# Altium PCB Arduino_FPGA_Shield.PcbDoc (part 2 of 2)
Units mil, origin at the board's own origin, x right, y up, seen from the top; angles counter-clockwise.
Board outline 2700 x 2100 mil, 4 copper layers (Top, PWR, GND, Bottom), stack 79.645 mil thick; 88 components, 145 nets, 490 pads, 201 vias.
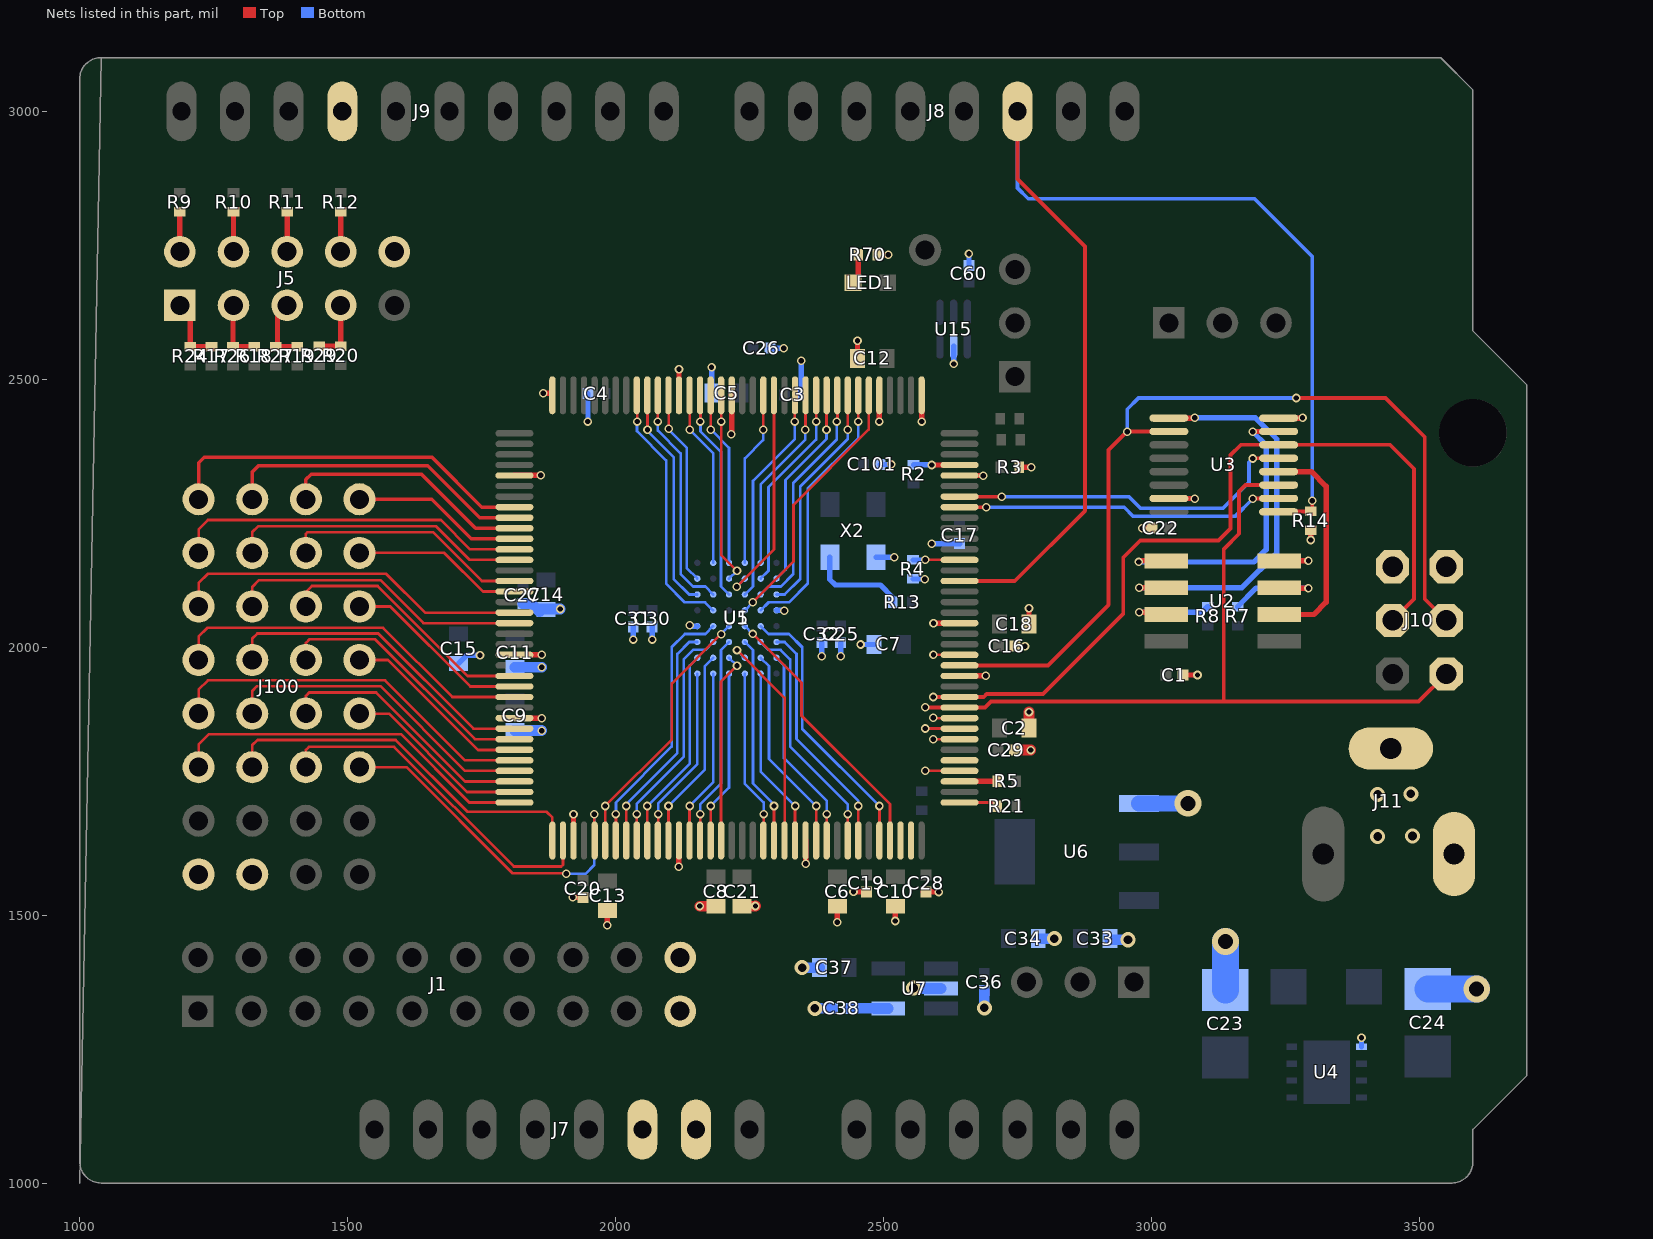
[diagram p4: the nets of this part, all layers, seen from the top]

## Via types
v1: diameter 16, hole 10, Top to Bottom, 176 vias
v2: diameter 28, hole 16, Top to Bottom, 10 vias
v3: diameter 15.94, hole 10, Top to Bottom, 8 vias
v4: diameter 19.68, hole 10, Top to Bottom, 4 vias
v5: diameter 50, hole 28, Top to Bottom, 3 vias

## Nets (pads, with @x,y where several pads share a name; then routed paths per layer and width w, separated by ;. In a path a pad name is that pad's centre, name@x,y a point inside that pad or via, vN(x,y) a via of type N, cw(c..) or ccw(c..) an arc to the next point about the centre after c; other vN are vias at no path point) (continued)
GND: C1.2 C2.2 C3.1 C4.1 C5.2 C6.2 C7.2 C8.2 C9.2 C10.2 C11.2 C12.2 C13.2 C14.1 C15.2 C16.1 C17.1 C18.1 C19.1 C20.1 C21.1 C22.2 C23.2 C24.2 C25.2 C26.2 C27.2 C28.1 C29.1 C30.2 C31.2 C32.2 C33.2 C34.2 C36.1 C37.1 C38.1 C60.1 C101.2 J1.19 J1.20 J5.10 J7.6 J7.7 J9.7 J10.6 J11.2 J11.3 J100.29 J100.30 R3.1 R4.1 R14.1 R70.2 U1.3 U1.13 U1.25 U1.49 U1.54 U1.68 U1.73 U1.77 U1.91 U1.96 U1.108 U1.113 U1.130 U1.136 U2.4 U3.8 U3.15 U4.1 U5.D1 U5.E6 U6.1 U7.2 U15.2 X2.2 | length 2627.1
  Top w5: U1.96@2117.91,2470.36 U1.96@2118.01,2470.26
  Top w10: U1.136@1800.33,1867.58 U1.136@1811.24,1867.58 v1@1864.58,1867.58 ; U1.130@1811.24,1985.69 1811.54,1986 v1(1862,1986) ; U1.113@1811.55,2320.65 v1(1860.49,2320.65) ; v1(1865,2474) 1878.05,2474 U1.108@1882.1,2469.95 ; v1(1920,1533) 1919.5,1533 1919.25,1533.25 C20.1@1939,1533.25 ; U1.3@1921.47,1639.24 v1(1921.47,1688.17) ; C13.2@1981.3,1509.84 1984.25,1506.89 v1(1984.25,1481.3) v1@1985,1482.05 ; v1(2118.11,1590.31) 2118.11,1639.45 U1.13@2118.32,1639.24 ; U1.96@2118.32,2469.95 v1(2118.32,2518.88) ; v1(2157,1516.88) v1@2157.44,1516.44 ; v1(2216,2397) 2216.85,2397.85 U1.91@2216.85,2469.84 ; U1.91@2216.12,2469.74 U1.91@2216.33,2469.53 ; v1(2354.65,1596) U1.25@2354.65,1639.34 ; v1(2413.56,1486.44) 2414,1486.88 C6.2@2414,1516.44 ; v1(2444,1543.5) 2444.25,1543.25 C19.1@2473,1543.25 ; C12.2@2451.44,2539 v1(2451.44,2571.56) ; R70.2@2488.19,2732.28 v1(2508.86,2732.28) ; v1(2492.34,2421.01) U1.77@2492.34,2469.95 ; v1(2522,1489) C10.2@2522,1516.44 ; v1(2571.08,2421.01) U1.73@2571.08,2469.95 ; C28.1@2574,1543.25 2602.75,1543.25 v1(2603,1543) ; v1@2577,2126 v1(2577,2127) ; v1(2593.25,2044.75) U1.54@2641.94,2044.75 ; U1.49@2641.94,1946.32 v1(2690.88,1946.32) ; U1.68@2641.94,2320.34 v1@2686,2320.34 ; C16.1@2745.75,2002 v1(2764,2002) ; R3.1@2753.72,2336 v1(2776,2336) ; C18.1@2771.56,2043 v1(2771.56,2072.44) ; v1(2983,2222) C22.2@3001.25,2222 ; U3.15@3032.64,2277.5 3080.5,2277.5 v1(3081,2277) ; C1.2@3058.75,1948 v1(3086,1948) ; U3.8@3237.36,2427.5 3283.5,2427.5 3283,2428 v1(3282,2428) ; U2.4@3238.32,2161 v1(3293,2161) ; v1(3297,2200) R14.1@3297,2218.28
  Top w20: v1@2157.44,1516.44 C8.2@2187,1516.44 ; C21.1@2236,1516.44 2260.44,1516.44 v1(2261,1517) ; C29.1@2744.75,1808 v1(2774.64,1808) ; C2.2@2771.56,1849 v1(2771.56,1878.89)
  Bottom w10: C15.2@1707,1969.44 1722.56,1985 v1(1747,1985) ; v1(1948,2421) 1948.5,2421.5 C4.1@1948.5,2473.35 ; v1(2033.18,2014.18) C31.2@2033.18,2039.43 ; v1(2068.18,2014.18) C30.2@2068.18,2039.43 ; v1(2138.59,2040.59) 2139.95,2039.24 U5.D1@2152.65,2039.24 ; v1(2179.13,2522.64) 2179.44,2522.33 C5.2@2179.44,2474 ; C26.2@2287.75,2558 v1(2314,2558) ; U5.E6@2300.29,2068.76 2314.42,2068.76 2314.59,2068.59 2313.98,2067.98 2313.98,2067.91 v1(2314.96,2067.91) ; C3.1@2346.75,2471 v1(2346.75,2534.75) ; v1(2385,1983) C32.2@2385,2008.25 ; v1(2420,1983) C25.2@2420,2008.25 ; v1(2457.19,2005) C7.2@2482.44,2005 ; X2.2@2486.31,2167.79 2519.79,2167.79 v1(2520,2168) ; C101.2@2493.75,2341 v1(2514.5,2341) ; R4.1@2555,2127.28 2576.72,2127.28 v1(2577,2127) ; v1@2590,2193 2590.25,2193.25 C17.1@2642,2193.25 ; v1(2630.91,2528.54) U15.2@2630.91,2562.01 ; v1(2659.45,2734.25) C60.1@2659.45,2712.6 C60.1@2661.42,2710.63 ; v1(3282,2428) v1@3283,2428 ; v1(3297,2200) v1@3299,2198 ; U4.1@3391.96,1254.24 v1(3392,1271) v1(3392,1271) ; C24.2@3516,1361.99 3569.99,1361.99
  Bottom w20: C9.2@1812,1844.44 v1@1861.75,1844.44 ; C11.2@1812,1962.44 v1@1862,1962.44 ; C27.2@1827,2081.25 1843.19,2081.25 C14.1@1858.19,2066.25 ; C14.1@1858.19,2071.25 v1(1897,2071.25) ; v2(2348,1402) C37.1@2380.44,1402 ; v2(2372,1326) C38.1@2405.25,1326 ; v2(2556,1364) 2557,1363 U7.2@2607.21,1363 ; v2(2688,1327) C36.1@2688,1359.25 ; C34.2@2788.56,1456 v2(2819,1456) ; C33.2@2922.56,1454 v2(2956.25,1454)
  Bottom w30: U6.1@2977.14,1708.55 v5(3068.15,1708.55)
  Bottom w50: C23.2@3138,1359.99 v5(3138,1451) ; C24.2@3516,1361.99 v5(3607.01,1361.99)
  other v1: 1862,1844.19 1862,1867.58 1862,1962.19 2590,2193.25 2686,2320
  other v2: 3422.24,1646.65 3487.2,1647.64 3422.24,1725.39 3484.25,1726.38
HARD_TCK: J5.1 R17.1 R24.1 | length 125.2
  Top w10: J5.1@1187,2638 1206,2619 R24.1@1206,2560.72 R17.1@1246,2560.72
HARD_TDI: J5.3 R18.1 R26.1 | length 126.4
  Top w10: J5.3@1296,2643 1286,2633 R26.1@1286,2560.72 R18.1@1326,2560.72
HARD_TDO: J5.5 R19.1 R27.1 | length 136.2
  Top w10: J5.5@1387,2638 1369,2620 1369,2563.43 R27.1@1366,2560.43 R19.1@1406,2560.43 ; J5.5@1389,2636 J5.5@1396,2643
HARD_TMS: J5.7 R20.1 R29.1 | length 129.3
  Top w10: R29.1@1447,2561.43 R20.1@1487,2561.43 J5.7@1487,2634 ; J5.7@1487,2638 J5.7@1487,2634 ; J5.7@1496,2643 J5.7@1487,2634
HOLD_N: R8.1 U2.7 | length 220.5
  Top w10: v1(2977,2065) 3023.69,2065 U2.7@3027.69,2061 U2.7@2992,2061
  Bottom w10: v1(2977,2065) 3094.28,2065 R8.1@3105,2075.72
INIT_B: R5.1 U1.39 | length 70.6
  Top w10: U1.39@2641.94,1749.47 2642.47,1750 R5.1@2712.28,1750
IO0: J100.1 U1.116 | length 700.1
  Top w6.69: J100.1@1222,2276 1222,2344 1232.33,2354.33 1657.48,2354.33 1750.53,2261.28 U1.116@1811.24,2261.28
IO1: J100.2 U1.117 | length 585.2
  Top w6.69: J100.2@1322,2276 1322,2327 1333.58,2338.58 1649.61,2338.58 1746.59,2241.6 U1.117@1811.24,2241.6
IO2: J100.3 U1.118 | length 472
  Top w6.69: J100.3@1422,2276 1422,2312.75 1432.09,2322.83 1637.8,2322.83 1738.72,2221.91 U1.118@1811.24,2221.91
IO3: J100.4 U1.119 | length 319.8
  Top w6.69: J100.4@1522,2276 1657.07,2276 1730.84,2202.23 U1.119@1811.24,2202.23
IO4: J100.5 U1.120 | length 663
  Top w5: J100.5@1222,2176 1222,2220 1239.2,2237.2 1673.8,2237.2 1728.46,2182.54 U1.120@1811.24,2182.54
IO5: J100.6 U1.121 | length 558.2
  Top w5: J100.6@1322,2176 1322,2214.5 1332.89,2225.39 1665.35,2225.39 1727.89,2162.86 U1.121@1811.24,2162.86
IO6: J100.7 U1.123 | length 463.7
  Top w5: J100.7@1422,2176 1422,2211.5 1425.07,2214.57 1659.45,2214.57 1750.53,2123.49 U1.123@1811.24,2123.49
IO7: J100.8 U1.124 | length 319.1
  Top w5: J100.8@1522,2176 1680.3,2176 1752.5,2103.8 U1.124@1811.24,2103.8
IO8: J100.9 U1.126 | length 670.3
  Top w5: J100.9@1222,2076 1222,2120 1239,2137 1572,2137 1644.57,2064.43 U1.126@1811.24,2064.43
IO9: J100.10 U1.127 | length 564.1
  Top w5: J100.10@1322,2076 1322,2112.35 1334.65,2125 1561.02,2125 1641.28,2044.75 U1.127@1811.24,2044.75
IO10: J100.11 U1.132 | length 490.4
  Top w5: J100.11@1422,2076 1422,2103 1433.17,2114.17 1556.1,2114.17 1723.95,1946.32 U1.132@1811.24,1946.32
IO11: J100.12 U1.133 | length 351.1
  Top w5: J100.12@1522,2076 1579.51,2076 1728.87,1926.64 U1.133@1811.24,1926.64
IO12: J100.13 U1.134 | length 693.3
  Top w5: J100.13@1222,1976 1222,2020 1238,2036 1566.36,2036 1695.41,1906.95 U1.134@1811.24,1906.95
IO13: J100.14 U1.137 | length 606.8
  Top w5: J100.14@1322,1976 1322,2016 1331.59,2025.59 1557.09,2025.59 1734.78,1847.9 U1.137@1811.24,1847.9
IO14: J100.15 U1.138 | length 501.3
  Top w5: J100.15@1422,1976 1422,2008 1428.76,2014.76 1551.18,2014.76 1737.73,1828.21 U1.138@1811.24,1828.21
IO15: J100.16 U1.139 | length 368
  Top w5: J100.16@1522,1976 1575.18,1976 1743.18,1808 1810.71,1808 U1.139@1811.24,1808.53 U1.139@1802.28,1808.53
IO16: J100.17 U1.140 | length 703.1
  Top w5: J100.17@1222,1876 1222,1921 1238.99,1937.99 1569.88,1937.99 1719.03,1788.84 U1.140@1811.24,1788.84
IO17: J100.18 U1.141 | length 600.8
  Top w5: J100.18@1322,1876 1322,1918.5 1330.67,1927.17 1561.02,1927.17 1719.03,1769.16 U1.141@1811.24,1769.16
IO18: J100.19 U1.142 | length 493.6
  Top w5: J100.19@1422,1876 1422,1909 1428.35,1915.35 1553.15,1915.35 1719.03,1749.47 U1.142@1811.24,1749.47
IO19: J100.20 U1.143 | length 349.8
  Top w5: J100.20@1522,1876 1576.76,1876 1722.97,1729.79 U1.143@1811.24,1729.79
IO20: J100.21 U1.144 | length 692.2
  Top w5: J100.21@1222,1776 1222,1818 1241.6,1837.6 1599.41,1837.6 1726.91,1710.1 U1.144@1811.24,1710.1
IO21: J100.22 U1.1 | length 707.8
  Top w5: J100.22@1322,1776 1322,1817 1331.77,1826.77 1589.57,1826.77 1723.48,1692.86 1871.14,1692.86 1882.1,1681.9 U1.1@1882.1,1639.24
IO22: J100.23 U1.2 | length 653.6
  Top w5: J100.23@1422,1776 1422,1808 1427.98,1813.98 1586.61,1813.98 1810.04,1590.55 1898.55,1590.55 1901.79,1593.79 U1.2@1901.79,1639.24
IO23: J100.24 U1.5 | length 671.2
  Top w5: J100.24@1522,1776 1609.83,1776 1807.74,1578.09 1906.91,1578.09 v1(1908,1577) ; v1(1960,1688) 1960,1640.08 U1.5@1960.84,1639.24
  Bottom w5: v1(1908,1577) 1944,1577 1960,1593 v1(1960,1688)
IO24: U1.45 | length 48.9
  Top w5: v1@2592.59,1867.17 U1.45@2641.53,1867.17
  other v1: 2593.01,1868.21
IO25: U1.44 | length 64.3
  Top w5: v1(2578.01,1848.21) U1.44@2642.26,1848.21
IO26: U1.43 | length 48.9
  Top w5: v1(2593.01,1828.21) U1.43@2641.94,1828.21
IO27: U1.41
IO28: U1.40 | length 64.3
  Top w5: v1(2577.69,1769.16) U1.40@2641.94,1769.16
IO29: U1.34
IO30: U1.35
M0: R2.1 U1.69 | length 86.3
  Top w10: v1(2590,2340) U1.69@2641.94,2340.02
  Bottom w10: R2.1@2556,2340.72 2589.28,2340.72 v1(2590,2340)
M1: R4.2 U1.60 | length 87
  Top w5: v1(2577.69,2162.86) U1.60@2641.94,2162.86
  Bottom w10: R4.2@2555,2162.72 2577.55,2162.72 v1(2577.69,2162.86)
MISO_ARD: J10.1 U1.46 U3.3 | length 1479.8
  Top w7: v1(2578.01,1887.58) U1.46@2642.26,1887.58 ; U1.46@2641.94,1887.27 2689.32,1887.27 2700.67,1898.62 3498.62,1898.62 J10.1@3550,1950 ; 3135.14,1899.61 3135.14,2183.37 3163.39,2211.61 3163.39,2290.39 3175.5,2302.5 U3.3@3237.36,2302.5
MISO_FL: U2.2 U3.4 | length 413.2
  Top w10: U3.4@3237.36,2327.5 3298.5,2327.5 3326,2300 3326,2084 3303,2061 U2.2@3238.32,2061
MISO_FPGA: U1.65 U3.2 | length 617.5
  Top w6.69: U1.65@2641.94,2261.28 v1(2691.59,2261.28) ; v1(3189,2277) 3188.5,2277.5 U3.2@3237.36,2277.5
  Bottom w6.69: v1(2691.59,2261.28) 2692.05,2260.83 2949.17,2260.83 2966,2244 3156,2244 v1(3189,2277)
MOSI_ARD: J10.4 U1.47 U3.6 | length 1572.9
  Top w7: v1(2593.01,1906.95) U1.47@2641.94,1906.95 2687.01,1906.95 2692.46,1912.4 2797.5,1912.4 2947.11,2062.01 ; 2947.5,2062.01 2947.5,2167.5 2979,2199 3125.18,2199 3147.64,2221.46 3147.64,2358.64 3166.5,2377.5 U3.6@3237.36,2377.5 3445.5,2377.5 3490,2333 3490,2090 J10.4@3450,2050 J10.4@3435,2035
MOSI_FL: U2.5 U3.7 | length 579.3
  Top w10: v1(2976,2159) 2978,2161 U2.5@3027.69,2161 ; v1@3188.5,2402.5 U3.7@3237.36,2402.5
  Bottom w10: v1(2976,2159) 3191,2159 3214,2182 3214,2377 v1(3189,2402)
MOSI_FPGA: U1.66 U3.5 | length 665.3
  Top w6.69: U1.66@2641.94,2280.97 v1(2720.82,2280.97) ; v1@3188.5,2352.5 U3.5@3237.36,2352.5
  Bottom w6.69: v1(2720.82,2280.97) 2958.2,2280.97 2980.31,2258.86 3132.86,2258.86 3182,2308 3182,2345 v1(3189,2352)
MUX_SEL: J8.3 R14.2 U1.58 U3.1 | length 2371
  Top w7: U1.58@2641.94,2123.49 2744.93,2123.49 2875.8,2254.36 2875.8,2747.64 2750,2873.45 J8.3@2750,3000 ; U3.1@3237.36,2252.5 3237.86,2253 R14.2@3299,2253 ; R14.2@3297,2253.72 3298.28,2253.72 3300,2255.43 v1(3300,2273)
  Bottom w7: J8.3@2750,3000 2750,2857 2770.27,2836.73 3192.27,2836.73 3300,2729 v1(3300,2273)
NetC38_2: C38.2 U7.4 | length 98.3
  Bottom w20: 2462,1326 C38.2@2436.75,1326 2484,1326 2483.6,1325.6 U7.4@2508.79,1325.6
NetLED1_2: LED1.2 R70.1 | length 59.2
  Top w10: LED1.2@2442.87,2680.12 2447.83,2680.12 2452.76,2685.04 R70.1@2452.76,2732.28
NetR13_2: R13.2 X2.3 | length 181.7
  Bottom w10: X2.3@2399.69,2167.79 2399.69,2126.31 2410,2116 2494,2116 2517.28,2092.72 R13.2@2517.28,2084
PROGRAM_B: R21.1 U1.37 | length 70.9
  Top w5: U1.37@2641.94,1710.1 R21.1@2712.28,1710.1 ; R21.1@2709,1707.28 R21.1@2709.39,1706.9
REF_CLK: U1.51 | length 64.1
  Top w5: v1(2593.2,1985.69) U1.51@2641.94,1985.69 U1.51@2642.25,1986 ; U1.51@2627,1984 U1.51@2641.94,1984
RESET_ARD: J10.5
SCLK_ARD: J10.3 U1.50 U3.10 | length 1734.8
  Top w7: U1.50@2641.94,1966.01 2807.09,1966.01 2920,2078.92 2920,2368 v1@2954.5,2402.5 ; v1@2955,2402.5 U3.10@3032.64,2402.5 ; v1(3270,2465) 3437,2465 3510,2392 3510,2090 J10.3@3550,2050
  Bottom w7: v1(2955,2402) 2955,2444 2976,2465 v1(3270,2465)
SCLK_FL: U2.6 U3.9 | length 765.1
  Top w10: v1(2977,2111) U2.6@3027.69,2111 ; U3.9@3032.64,2427.5 v1@3081.5,2427.5
  Bottom w10: v1(2977,2111) 3169.07,2111 3234,2175.93 3234,2388 3194,2428 v1(3081,2428)
SOFT_TCK: J5.2 R9.1 | length 74.3
  Top w10: J5.2@1187,2738 R9.1@1187,2812.28
SOFT_TDI: J5.4 R10.1 | length 74.3
  Top w10: J5.4@1287,2738 R10.1@1287,2812.28
SOFT_TDO: J5.6 R11.1 | length 74.3
  Top w10: J5.6@1387,2738 R11.1@1387,2812.28
SOFT_TMS: J5.8 R12.1 | length 74.3
  Top w10: J5.8@1487,2738 R12.1@1487,2812.28
SRAM0_A0: U1.16 U5.A3 | length 325.6
  Top w5: U1.16@2177.38,1639.24 2177.48,1639.34 v1(2177.48,1703.59)
  Bottom w5: v1(2177.48,1703.59) 2211.71,1737.82 U5.A3@2211.71,1950.65
SRAM0_A1: U1.21 U5.A4 | length 326.1
  Top w5: U1.21@2275.8,1639.24 2276.22,1639.65 v1(2276.22,1688.59)
  Bottom w5: U5.A4@2241.24,1950.65 2241.24,1744.94 2276.22,1709.96 v1(2276.22,1688.59)
SRAM0_A2: U1.24 U5.A5 | length 338.1
  Top w5: U1.24@2334.86,1639.24 2334.96,1639.34 v1(2334.96,1703.59)
  Bottom w5: U5.A5@2270.76,1950.65 2270.76,1767.79 v1(2334.96,1703.59)
SRAM0_A3: U1.17 U5.B3 | length 359.6
  Top w5: U1.17@2197.06,1639.24 2196.59,1639.71 2196.59,1935.59 v1(2226.59,1965.59)
  Bottom w5: U5.B3@2211.71,1980.18 v1@2226.3,1965.59
SRAM0_A4: U1.23 U5.B4 | length 413
  Top w5: v1(2226.59,1994.59) 2315.65,1905.54 U1.23@2315.65,1639.71 ; U1.23@2314.59,1639.82 U1.23@2315.17,1639.24
  Bottom w5: v1(2226.59,1994.59) U5.B4@2241,1980.18
SRAM0_A5: U1.15 U5.C3 | length 392.8
  Top w5: U1.15@2157.69,1639.24 2158.11,1639.65 v1(2158.11,1688.59)
  Bottom w5: v1(2158.11,1688.59) 2158.11,1707.11 2196.59,1745.59 2196.59,1994.59 U5.C3@2211.71,2009.71
SRAM0_A6: U1.22 U5.C4 | length 393
  Top w5: U1.22@2295.49,1639.24 2295.59,1639.34 v1(2295.59,1703.59)
  Bottom w5: U5.C4@2241.24,2009.71 2256.35,1994.59 2256.35,1745.59 2295.59,1706.35 v1(2295.59,1703.59)
SRAM0_A7: U1.33 U5.D4 | length 512
  Top w5: v1(2256.12,2024.65) 2347,1933.76 2347,1872 2512.02,1706.98 U1.33@2512.02,1639.24
  Bottom w5: U5.D4@2241.24,2039.24 v1@2255.83,2024.65
SRAM0_A8: U1.95 U5.H2 | length 331.4
  Top w5: U1.95@2137.38,2470.15 U1.95@2137.59,2470.36 ; v1(2138.32,2406.01) U1.95@2138.32,2470.26
  Bottom w5: v1(2138.32,2406.01) 2182.18,2362.15 U5.H2@2182.18,2157.35
SRAM0_A9: U1.93 U5.H3 | length 327.6
  Top w5: U1.93@2176.96,2470.36 U1.93@2177.38,2469.95 ; v1(2177.69,2406.01) U1.93@2177.69,2470.26
  Bottom w5: v1(2177.69,2406.01) 2211.71,2371.99 U5.H3@2211.71,2157.35
SRAM0_A10: U1.88 U5.H4 | length 327.2
  Top w5: U1.88@2275.39,2470.36 2275.49,2470.26 v1(2275.49,2406.01)
  Bottom w5: U5.H4@2241.24,2157.35 2241.24,2352.24 2275.49,2386.49 v1(2275.49,2406.01)
SRAM0_A11: U1.84 U5.H5 | length 350.4
  Top w5: U1.84@2354.13,2470.36 2354.5,2469.99 2354.5,2406.28 v1(2354.23,2406.01)
  Bottom w5: U5.H5@2272.59,2159.17 U5.H5@2270.76,2157.35 2270.76,2303.76 2354.23,2387.23 v1(2354.23,2406.01)
SRAM0_A12: U1.92 U5.G3 | length 381.5
  Top w5: U1.92@2196.65,2470.36 U1.92@2196.75,2470.26 ; U1.92@2197.06,2469.95 v1(2197.06,2421.01) 2197.06,2171.94 v1(2226.59,2142.41)
  Bottom w5: v1(2226.59,2142.41) v1@2226.3,2142.41 ; v1@2226.3,2142.41 U5.G3@2211.71,2127.82 v1@2226.3,2142.41
SRAM0_A13: U1.87 U5.G4 | length 407
  Top w5: v1@2226.59,2113.41 2295.49,2182.31 U1.87@2295.49,2469.95 U1.87@2295.07,2470.36
  Bottom w5: v1(2226.35,2112.88) U5.G4@2241.24,2127.82 U5.G4@2241.24,2127.82 ; v1@2226.59,2113.41 v1@2226.83,2113.41
SRAM0_A14: U1.94 U5.F3 | length 394.1
  Top w5: U1.94@2157.28,2470.36 U1.94@2157.38,2470.26 ; v1(2158.32,2421.01) U1.94@2158.32,2470.15
  Bottom w5: v1(2158.32,2421.01) 2158.32,2402.68 2196.59,2364.41 2196.59,2113.41 U5.F3@2211.71,2098.29
SRAM0_A15: U1.85 U5.F4 | length 420.1
  Top w5: U1.85@2334.23,2470.15 v1(2334.24,2421) v1@2339,2421
  Bottom w5: U5.F4@2241.24,2098.29 2256.35,2113.41 2256.35,2310.35 2334.43,2388.43 2334.43,2420.81 v1(2334.24,2421) v1@2339,2421
SRAM0_A16: U1.78 U5.E4 | length 497.1
  Top w5: v1(2255.83,2083.65) 2332,2159.82 2332,2265.67 2472.34,2406.01 2472.34,2470.26 U1.78@2472.24,2470.36
  Bottom w5: U5.E4@2241.24,2068.76 v1@2255.83,2083.35
SRAM0_A17: U1.6 U5.D3 | length 495.3
  Top w5: U1.6@1980.63,1639.34 v1(1980.63,1703.59) 2105,1827.96 2105,1932.24 v1(2197.12,2024.35)
  Bottom w5: v1@2197.12,2024.65 U5.D3@2211.71,2039.24
SRAM0_CS_N: U1.26 U5.B5 | length 383.9
  Top w5: U1.26@2374.23,1639.24 2374.33,1639.34 v1(2374.33,1703.59)
  Bottom w5: U5.B5@2270.76,1980.18 2286.35,1964.59 2286.35,1791.57 v1(2374.33,1703.59)
SRAM0_D0: U1.27 U5.B6 | length 380.1
  Top w5: U1.27@2393.91,1639.24 2394.33,1639.65 v1(2394.33,1688.59)
  Bottom w5: U5.B6@2300.29,1980.18 2314.35,1966.12 2314.35,1792.93 2394.33,1712.95 v1(2394.33,1688.59)
SRAM0_D1: U1.29 U5.C5 | length 451.3
  Top w5: v1(2433.07,1688.59) 2433.07,1639.45 U1.29@2433.28,1639.24
  Bottom w5: U5.C5@2270.76,2009.71 2270.76,2009.42 2285.1,1995.08 2308.1,1995.08 2325.79,1977.39 2325.79,1814.39 2433.07,1707.11 v1(2433.07,1688.59)
SRAM0_D2: U1.30 U5.C6 | length 442.7
  Top w5: U1.30@2452.97,1639.24 2453.07,1639.34 v1(2453.07,1703.59)
  Bottom w5: U5.C6@2300.29,2009.71 2315.47,2009.71 2337.6,1987.58 2337.6,1828.74 2453.07,1713.27 v1(2453.07,1703.59)
SRAM0_D3: U1.32 U5.D5 | length 514.2
  Top w5: U1.32@2492.34,1639.24 2492.44,1639.34 v1(2492.44,1703.59)
  Bottom w5: U5.D5@2270.76,2039.24 2285.41,2024.59 2323.59,2024.59 2348.35,1999.83 2348.35,1847.68 v1(2492.44,1703.59)
SRAM0_D4: U1.79 U5.E5 | length 499.7
  Top w5: U1.79@2452.55,2470.36 U1.79@2452.97,2469.95 v1(2452.97,2421.01)
  Bottom w5: U5.E5@2270.76,2068.76 2285.81,2083.81 2321.54,2083.81 2321.69,2083.66 2323.84,2083.66 2358.59,2118.41 2358.59,2295.6 2452.97,2389.98 v1(2452.97,2421.01)
SRAM0_D5: U1.81 U5.F5 | length 444.3
  Top w5: v1@2414.02,2420.59 U1.81@2414.02,2469.53
  Top w10: U1.81@2412.97,2470.15 U1.81@2413.18,2470.36
  Bottom w5: U5.F5@2270.76,2098.29 2270.76,2098.58 2285.37,2113.19 2308.37,2113.19 2331.59,2136.41 2331.59,2306.59 2412.97,2387.97 v1(2412.97,2421.01)
SRAM0_D6: U1.80 U5.F6 | length 436
  Top w5: U1.80@2432.87,2470.36 2432.97,2470.26 v1(2432.97,2406.01)
  Bottom w5: U5.F6@2300.29,2098.29 2315.47,2098.29 2344.59,2127.41 2344.59,2299.59 2432.97,2387.97 v1(2432.97,2406.01)
SRAM0_D7: U1.82 U5.G6 | length 381.2
  Top w5: U1.82@2393.5,2470.36 2393.6,2470.26 v1(2393.6,2406.01)
  Bottom w5: U5.G6@2300.29,2127.82 2317.02,2144.55 2317.02,2312.02 2393.6,2388.6 v1(2393.6,2406.01)
SRAM0_D8: U1.10 U5.B1 | length 381.6
  Top w5: U1.10@2059.27,1639.24 2059.37,1639.34 v1(2059.37,1703.59)
  Bottom w5: v1@2059.09,1701.09 v1@2060.48,1702.48 ; v1(2059.37,1703.59) 2138.59,1782.81 2138.59,1966.12 U5.B1@2152.65,1980.18
SRAM0_D9: U1.8 U5.C1 | length 434.4
  Top w5: U1.8@2019.9,1639.24 2020,1639.34 v1(2020,1703.59)
  Bottom w5: v1(2020,1703.59) 2020,1707.01 2115.16,1802.17 2115.16,1987.39 2137.47,2009.71 U5.C1@2152.65,2009.71
SRAM0_D10: U1.9 U5.C2 | length 443.2
  Top w5: v1(2039.37,1688.59) 2039.37,1639.45 U1.9@2039.58,1639.24
  Bottom w5: v1(2039.37,1688.59) 2039.37,1707.68 2126.97,1795.28 2126.97,1977.2 2144.84,1995.08 2167.84,1995.08 2182.18,2009.42 U5.C2@2182.18,2009.71
SRAM0_D11: U1.7 U5.D2 | length 497.7
  Top w5: U1.7@2000.21,1639.24 2000.63,1639.65 v1(2000.63,1688.59)
  Bottom w5: v1(2000.63,1688.59) 2000.63,1710.28 2104.59,1814.24 2104.59,1999.83 2129.35,2024.59 2167.54,2024.59 U5.D2@2182.18,2039.24
SRAM0_D12: U1.100 U5.E2 | length 482.7
  Top w5: v1(2040.21,2421.01) U1.100@2040.21,2470.15
  Bottom w5: v1(2040.21,2421.01) 2040,2420.8 2040,2403 2094.35,2348.65 2094.35,2118.41 2129.1,2083.66 2167.28,2083.66 U5.E2@2182.18,2068.76
SRAM0_D13: U1.98 U5.F2 | length 427.9
  Top w5: v1(2078.95,2421.01) U1.98@2078.95,2469.95
  Bottom w5: v1(2078.95,2421.01) 2078.95,2404.05 2121.35,2361.65 2121.35,2136.41 2144.57,2113.19 2167.57,2113.19 2182.18,2098.58 U5.F2@2182.18,2098.29
SRAM0_D14: U1.99 U5.F1 | length 419.4
  Top w5: v1(2059.58,2406.01) U1.99@2059.58,2470.26
  Bottom w5: v1(2059.58,2406.01) 2059.58,2403.28 2108.35,2354.5 2108.35,2127.41 2137.47,2098.29 U5.F1@2152.65,2098.29
SRAM0_D15: U1.97 U5.G1 | length 368.6
  Top w5: U1.97@2098.22,2470.36 U1.97@2098.64,2469.95 ; U1.97@2098.95,2470.26 2098.95,2406.01 2099.41,2406.46 v1(2099.41,2407.48)
  Bottom w5: v1(2099.41,2407.48) 2099.41,2406.46 2098.95,2406.01 2132.59,2372.37 2132.59,2147.88 U5.G1@2152.65,2127.82
SRAM0_HBE_N: U1.12 U5.B2 | length 375.5
  Top w5: U1.12@2098.64,1639.24 2098.74,1639.34 v1(2098.74,1703.59)
  Bottom w5: v1(2098.74,1703.59) 2166.59,1771.44 2166.59,1964.59 U5.B2@2182.18,1980.18
SRAM0_LBE_N: U1.11 U5.A1 | length 341.9
  Top w5: U1.11@2078.95,1639.24 2079.37,1639.65 v1(2079.37,1688.59)
  Bottom w5: v1(2079.37,1688.59) 2079.37,1708.31 2152.65,1781.59 U5.A1@2152.65,1950.65
SRAM0_OE_N: U1.14 U5.A2 | length 329.7
  Top w5: U1.14@2138.01,1639.24 2138.11,1639.34 v1(2138.11,1703.59)
  Bottom w5: v1(2138.11,1703.59) 2182.18,1747.66 U5.A2@2182.18,1950.65
SRAM0_WE_N: U1.83 U5.G5 | length 385.6
  Top w5: U1.83@2373.81,2470.36 U1.83@2374.23,2469.95 v1(2374.23,2421.01)
  Bottom w5: U5.G5@2270.76,2127.82 2285.53,2142.58 2285.53,2298.53 2374.23,2387.23 v1(2374.23,2421.01)
WP_N: R7.1 U2.3 | length 201.3
  Top w10: U2.3@3238.32,2111 3239.32,2110 v1(3293,2110)
  Bottom w10: R7.1@3161,2075.72 3195.28,2110 v1(3293,2110)
pads on no net: J1.3 J1.4 J1.5 J1.6 J1.7 J1.8 J1.9 J1.10 J1.11 J1.12 J1.13 J1.14 J1.15 J1.16 J1.17 J1.18 J7.1 J7.4 J7.8 J9.9 J9.10 J10.2 U1.72 U1.131 U4.3 U4.4 U4.5 U5.A6 U5.E3 U5.G2 U5.H1 U5.H6 X2.1

## Polygon pours and split planes (outlines as drawn)
3V3 on PWR (split plane): 1039.75,3079.93 1040,3079.9 3531.68,3079.9 3579.9,3031.68 3579.9,2590 3580.29,2586.08 3581.43,2582.31 3583.29,2578.83 3585.79,2575.79 3679.9,2481.68 3679.9,1208.32 3585.79,1114.21 3583.29,1111.17 3581.43,1107.69 3580.29,1103.92 3579.9,1100 3579.9,1040 3579.93,1039.75 3579.97,1039.27 3579.62,1035.7 3578.51,1032.04 3576.71,1028.67 3574.29,1025.71 3571.33,1023.29 3567.96,1021.49 3564.3,1020.38 3561.23,1020.07 3561,1020.1 3050,1020.1 3050,1254 2348,1254 2348,1020.1 1040,1020.1 1039.53,1020.05 1036.1,1020.39 1032.35,1021.53 1028.89,1023.37 1025.86,1025.86 1023.37,1028.89 1021.53,1032.35 1020.39,1036.1 1020.05,1039.53 1020.1,1040 1020.1,3061 1020.07,3061.23 1020.38,3064.3 1021.49,3067.96 1023.29,3071.33 1025.71,3074.29 1028.67,3076.71 1032.04,3078.51 1035.7,3079.62 1039.27,3079.97
GND on GND (split plane): 1039.75,3079.93 1040,3079.9 3531.68,3079.9 3579.9,3031.68 3579.9,2590 3580.29,2586.08 3581.43,2582.31 3583.29,2578.83 3585.79,2575.79 3679.9,2481.68 3679.9,1208.32 3585.79,1114.21 3583.29,1111.17 3581.43,1107.69 3580.29,1103.92 3579.9,1100 3579.9,1040 3579.93,1039.75 3579.97,1039.27 3579.62,1035.7 3578.51,1032.04 3576.71,1028.67 3574.29,1025.71 3571.33,1023.29 3567.96,1021.49 3564.3,1020.38 3561.23,1020.07 3561,1020.1 3050,1020.1 3050,1254 2348,1254 2348,1020.1 1040,1020.1 1039.53,1020.05 1036.1,1020.39 1032.35,1021.53 1028.89,1023.37 1025.86,1025.86 1023.37,1028.89 1021.53,1032.35 1020.39,1036.1 1020.05,1039.53 1020.1,1040 1020.1,3061 1020.07,3061.23 1020.38,3064.3 1021.49,3067.96 1023.29,3071.33 1025.71,3074.29 1028.67,3076.71 1032.04,3078.51 1035.7,3079.62 1039.27,3079.97

## Keep-outs
Keep-Out Layer:
  lines w10: 1000,1040 ccw(c1040,1040) 1040,1000 3561,1000 ccw(c3560.5,1039.5) 3600,1040 3600,1100 3700,1200 3700,2490 3600,2590 3600,3040 3540,3100 1040,3100 ccw(c1039.5,3060.5) 1000,3061 1000,1040
  text ".Layer_Name" at 1000,900 h28

## Other copper
Top:
  text ".Layer_Name" at 1000,900 h28
Bottom:
  rectangle net GND: 3369.09,1533.46 3661.42,1850.39
  region net EXT_PWR: 3412,1228 3431,1247 3477,1247 3477,1199 3430,1199 3412,1217
  region net 5V0_REG: 3247,1260 3271,1260 3271,1186 3247,1186
  text ".Layer_Name" at 1000,900 h28
GND (plane layer: these items are gaps in the copper):
  rectangle: 2348,1000 3050,1254
  text ".Layer_Name" at 1000,900 h28
PWR (plane layer: these items are gaps in the copper):
  rectangle: 2348,1000 3050,1254
  text ".Layer_Name" at 1000,900 h28

## Silkscreen, mask and mechanical layers (free items; w line width, h text height)
Top Overlay:
  drawing of 54 lines, arcs and shapes, not listed
  text "1" at 2862.39,2901.66 h47.6 r90
  text "3" at 2667.58,2900.56 h47.6 r90
  text "2" at 2767.58,2900.56 h47.6 r90
  text "9" at 2007.58,2899.77 h47.6 r90
  text "7" at 2267.58,2899.9 h47.6 r90
  text "6" at 2367.58,2899.82 h47.6 r90
  text "5" at 2467.58,2900.43 h47.6 r90
  text "8" at 2107.58,2899.38 h47.6 r90
  text "0" at 2967.58,2898.94 h47.6 r90
  text "4" at 2567.58,2898.28 h47.6 r90
  text "13" at 1607.58,2882.17 h47.6 r90
  text "12" at 1707.58,2882 h47.6 r90
  text "11" at 1807.58,2881.91 h47.6 r90
  text "10" at 1907.58,2881.16 h47.6 r90
  text "*" at 2010,2880 h37.4 r90
  text "*" at 2370,2880 h37.4 r90
  text "*" at 2470,2880 h37.4 r90
  text "*" at 2670,2880 h37.4 r90
  text "*" at 1810,2860 h37.4 r90
  text "*" at 1910,2860 h37.4 r90
  text "GND" at 1508.58,2844.73 h47.6 r90
  text "AREF" at 1404.58,2836.63 h47.6 r90
  text "(*PWM)" at 2265,2815 h37.4
  text "DIGITAL" at 2070,2810 h66.1
  text "TX" at 2860,2750 h47.6 r90
  text "RX" at 2970,2750 h47.6 r90
  text "bank1" at 2159.78,2350.46 h28
  text "bank2" at 2522.46,2121.4 h28 r270
  text "bank0" at 1930.72,1987.78 h28 r90
  text "bank3" at 2293.4,1758.72 h28 r180
  text "POWER" at 1985,1230 h56.1
  text "ANALOG IN" at 2598.43,1228.35 h56.1
  text "A0" at 2434,1171 h34
  text "A1" at 2534,1171 h34
  text "A2" at 2634,1171 h34
  text "A3" at 2734,1171 h34
  text "A4" at 2834,1171 h34
  text "A5" at 2934,1171 h34
  text "IOREF" at 1600,1170 h47.6
  text "RESET" at 1705,1170 h47.6
  text "3V3" at 1820,1170 h47.6
  text "5V" at 1930,1170 h47.6
  text "GND" at 2065,1170 h47.6
  text "VIN" at 2220,1165 h47.6
  text ".Layer_Name" at 1000,900 h28
Bottom Overlay:
  text ".Layer_Name" at 1000,900 h28
Bottom Paste:
  text ".Layer_Name" at 1000,900 h28
Drill Guide:
  text ".Layer_Name" at 1000,900 h28
Dimension:
  lines w10: 1000,1040 ccw(c1040,1040) 1040,1000 3561,1000 ccw(c3560.5,1039.5) 3600,1040 3600,1100 3700,1200 3700,2490 3600,2590 3600,3040 3540,3100 1040,3100 ccw(c1039.5,3060.5) 1000,3061 1000,1040
  text ".Layer_Name" at 1000,900 h28
tNames:
  text ".Layer_Name" at 1000,900 h28
bGlue:
  text ".Layer_Name" at 1000,900 h28
Document:
  text ".Layer_Name" at 1000,900 h28
ReferenceLS:
  text ".Layer_Name" at 1000,900 h28
tDocu:
  text ".Layer_Name" at 1000,900 h28
Drill Drawing:
  drawing of 436 lines, arcs and shapes, not listed
  text "Layer" at 4960,6532.13 h60
  text "Name" at 5221.09,6532.13 h60
  text "Material" at 5716.67,6532.13 h60
  text "Thickness" at 6163.02,6532.13 h60
  text "Constant" at 6531.45,6532.13 h60
  text "Board Layer Stack" at 6873.18,6532.13 h60
  text "1" at 4960,6412.13 h60
  text "Top Paste" at 5221.09,6412.13 h60
  text "2" at 4960,6292.13 h60
  text "Top Overlay" at 5221.09,6292.13 h60
  text "3" at 4960,6172.13 h60
  text "Top Solder" at 5221.09,6172.13 h60
  text "Solder Resist" at 5716.67,6172.13 h60
  text "0.40mil" at 6163.02,6172.13 h60
  text "3.5" at 6531.45,6172.13 h60
  text "4" at 4960,6052.13 h60
  text "Top" at 5221.09,6052.13 h60
  text "Copper" at 5716.67,6052.13 h60
  text "1.38mil" at 6163.02,6052.13 h60
  text "5" at 4960,5932.13 h60
  text "Dielectric 1" at 5221.09,5932.13 h60
  text "FR-4" at 5716.67,5932.13 h60
  text "59.05mil" at 6163.02,5932.13 h60
  text "4.8" at 6531.45,5932.13 h60
  text "6" at 4960,5812.13 h60
  text "PWR" at 5221.09,5812.13 h60
  text "Copper" at 5716.67,5812.13 h60
  text "1.42mil" at 6163.02,5812.13 h60
  text "7" at 4960,5692.13 h60
  text "Dielectric 4" at 5221.09,5692.13 h60
  text "5.00mil" at 6163.02,5692.13 h60
  text "4.2" at 6531.45,5692.13 h60
  text "8" at 4960,5572.13 h60
  text "GND" at 5221.09,5572.13 h60
  text "Copper" at 5716.67,5572.13 h60
  text "1.42mil" at 6163.02,5572.13 h60
  text "9" at 4960,5452.13 h60
  text "Dielectric 2" at 5221.09,5452.13 h60
  text "10.00mil" at 6163.02,5452.13 h60
  text "4.2" at 6531.45,5452.13 h60
  text "10" at 4960,5332.13 h60
  text "Bottom" at 5221.09,5332.13 h60
  text "Copper" at 5716.67,5332.13 h60
  text "1.38mil" at 6163.02,5332.13 h60
  text "11" at 4960,5212.13 h60
  text "Bottom Solder" at 5221.09,5212.13 h60
  text "Solder Resist" at 5716.67,5212.13 h60
  text "0.40mil" at 6163.02,5212.13 h60
  text "3.5" at 6531.45,5212.13 h60
  text "12" at 4960,5092.13 h60
  text "Bottom Overlay" at 5221.09,5092.13 h60
  text "13" at 4960,4972.13 h60
  text "Bottom Paste" at 5221.09,4972.13 h60
  text "Symbol" at 4983.21,2729.05 h72
  text "Hit Count" at 5290.11,2729.05 h72
  text "Finished Hole Size" at 5652.36,2729.05 h72
  text "Plated" at 6281.13,2729.05 h72
  text "Hole Type" at 6553.6,2729.05 h72
  text "Physical Length" at 6938.89,2729.05 h72
  text "Rout Path Length" at 7537.96,2729.05 h72
  text "1" at 5290.11,2579.87 h60
  text "39.37mil (1.000mm)" at 5652.36,2579.87 h60
  text "PTH" at 6281.13,2579.87 h60
  text "Slot" at 6553.6,2579.87 h60
  text "137.80mil (3.500mm)" at 6938.89,2579.87 h60
  text "98.43mil (2.500mm)" at 7537.96,2579.87 h60
  text "2" at 5290.11,2430.69 h60
  text "39.37mil (1.000mm)" at 5652.36,2430.69 h60
  text "PTH" at 6281.13,2430.69 h60
  text "Slot" at 6553.6,2430.69 h60
  text "118.11mil (3.000mm)" at 6938.89,2430.69 h60
  text "78.74mil (2.000mm)" at 7537.96,2430.69 h60
  text "188" at 5290.11,2281.51 h60
  text "10.00mil (0.254mm)" at 5652.36,2281.51 h60
  text "PTH" at 6281.13,2281.51 h60
  text "Round" at 6553.6,2281.51 h60
  text "10" at 5290.11,2132.33 h60
  text "16.00mil (0.406mm)" at 5652.36,2132.33 h60
  text "PTH" at 6281.13,2132.33 h60
  text "Round" at 6553.6,2132.33 h60
  text "3" at 5290.11,1983.15 h60
  text "28.00mil (0.711mm)" at 5652.36,1983.15 h60
  text "PTH" at 6281.13,1983.15 h60
  text "Round" at 6553.6,1983.15 h60
  text "32" at 5290.11,1833.97 h60
  text "34.00mil (0.864mm)" at 5652.36,1833.97 h60
  text "PTH" at 6281.13,1833.97 h60
  text "Round" at 6553.6,1833.97 h60
  text "39" at 5290.11,1684.79 h60
  text "35.43mil (0.900mm)" at 5652.36,1684.79 h60
  text "PTH" at 6281.13,1684.79 h60
  text "Round" at 6553.6,1684.79 h60
  text "33" at 5290.11,1535.6 h60
  text "35.50mil (0.902mm)" at 5652.36,1535.6 h60
  text "PTH" at 6281.13,1535.6 h60
  text "Round" at 6553.6,1535.6 h60
  text "6" at 5290.11,1386.42 h60
  text "38.00mil (0.965mm)" at 5652.36,1386.42 h60
  text "PTH" at 6281.13,1386.42 h60
  text "Round" at 6553.6,1386.42 h60
  text "1" at 5290.11,1237.24 h60
  text "126.00mil (3.200mm)" at 5652.36,1237.24 h60
  text "PTH" at 6281.13,1237.24 h60
  text "Round" at 6553.6,1237.24 h60
  text "315 Total" at 5290.11,1088.06 h60
  text ".Layer_Name" at 1000,900 h28
Unrouted:
  lines w0: 4734,2739 4750,2735
  text ".Layer_Name" at 1000,900 h28
214bmp:
  text "D:/SmartProjects/Snc/a4_bn_logo2.bmp" at 1000,997.5 h0.85
  text ".Layer_Name" at 1000,900 h28

## Text inside footprints (layer, text, board x,y; h text height)
J1: Top Overlay "2" at 1145.47,1443.9 h25; Top Overlay "1" at 1150.47,1273.9 h25
J5: Top Overlay "1" at 1117,2593 h25; Top Overlay "2" at 1107,2758 h25
J100: Top Overlay "1" at 1142,2296 h28; Top Overlay "4" at 1582,2296 h28